# Altium PCB Spring_counter_part_PCB.PcbDoc
Units mm, origin at the board's own origin, x right, y up, seen from the top; angles counter-clockwise.
Board outline 50 x 15 mm, 2 copper layers (Top Layer, Bottom Layer); 102 components, 12 nets, 102 pads, 0 vias.
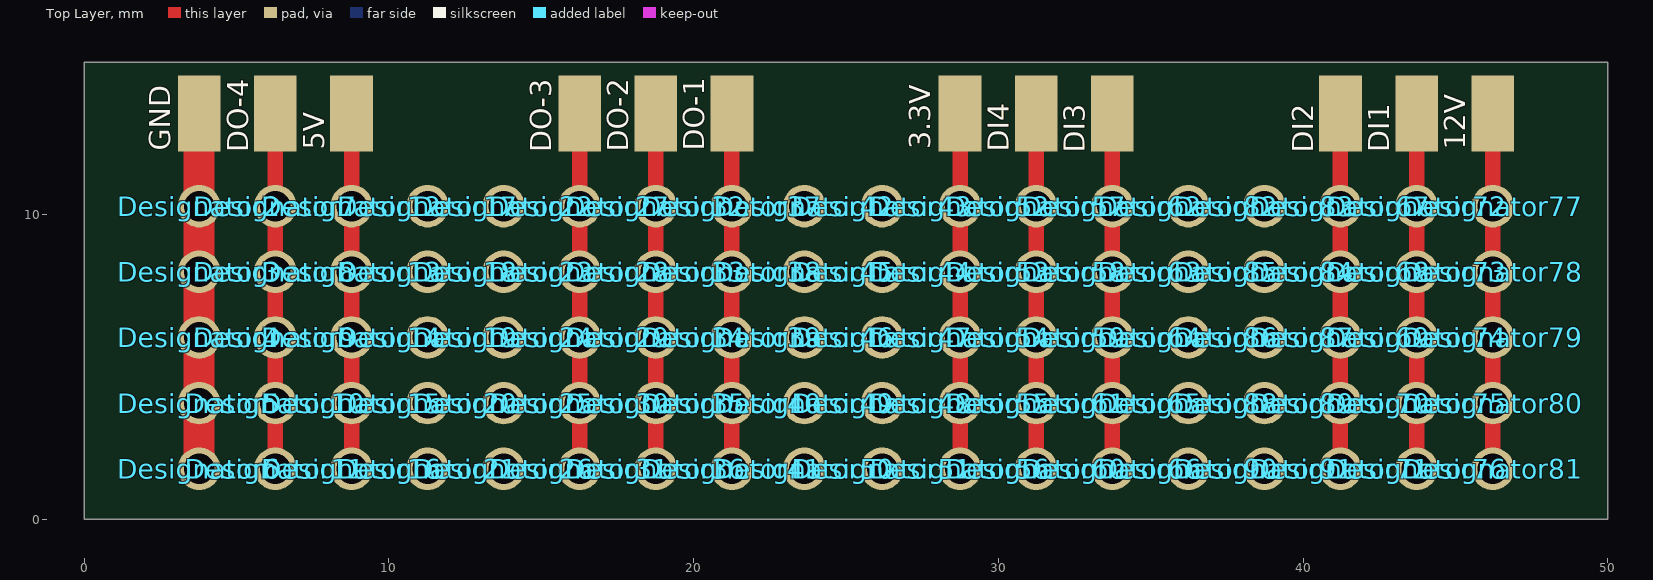
[diagram p0: Top Layer view]
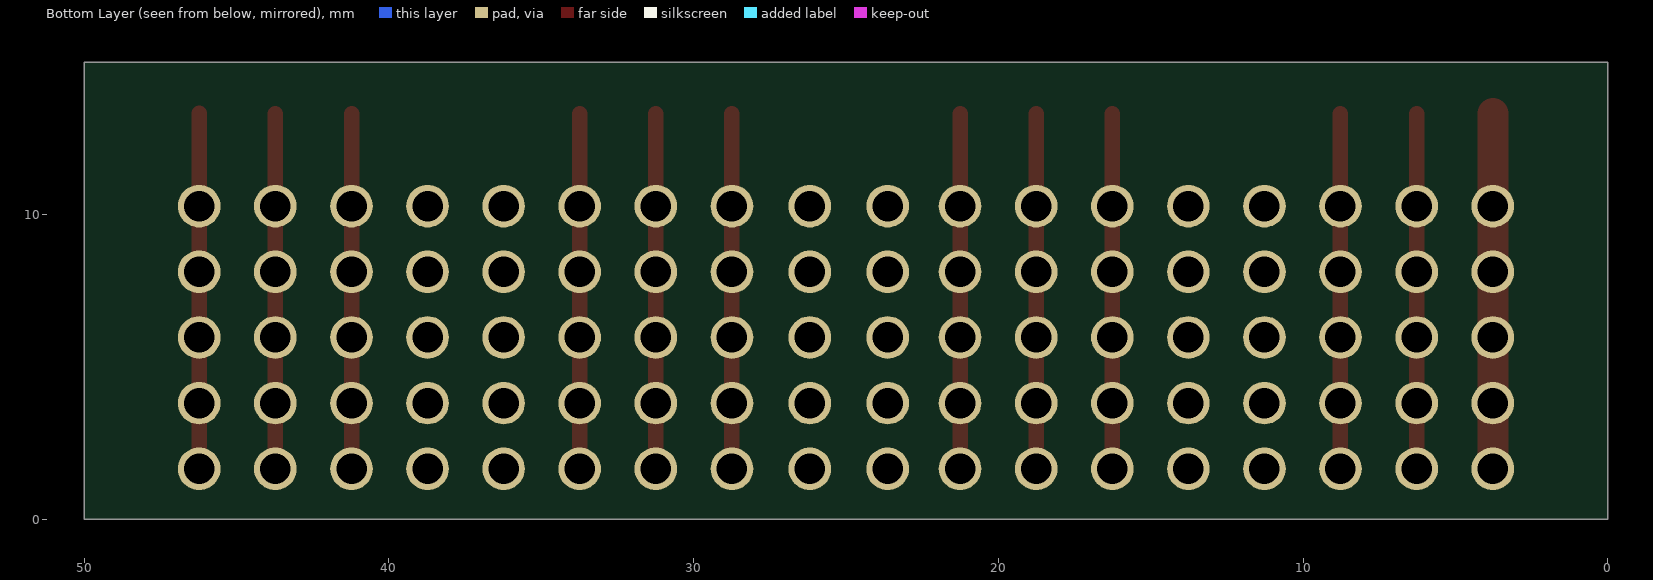
[diagram p1: Bottom Layer view, seen from below]

## Layer stack, top to bottom
Top Solder: solder mask 0.0102, Solder Resist, Dk 3.5
Top Layer: signal copper 0.0356
Dielectric 1: dielectric 0.32, FR-4, Dk 4.8
Bottom Layer: signal copper 0.0356
Bottom Solder: solder mask 0.0102, Solder Resist, Dk 3.5

## Board outline
0,0 50,0 50,15 0,15

## Design rules (kind name [scope] priority, off if disabled: settings)
Clearance Clearance_poly [(InPoly)] p1: gap=0.508 ignorepadtopadclearanceinfootprint=FALSE
Clearance Clearance_IC [IsPad AND HasFootprint('LM3150') OR IsPad AND HasFootprint('TSSOP14') OR IsPad AND HasFootprint('LQFP48') OR IsPad AND HasFootprint('SOT363') OR IsPad AND HasFootprint('SOT563') OR IsPad AND  HasFootprint('LQFP64') OR IsPad AND  HasFootprint('MSOP-8') OR IsPad AND HasFootprint('MEC6-130-02-L-D-RA1')] p2: gap=0.152 ignorepadtopadclearanceinfootprint=FALSE
Clearance [All] p3: gap=0.254 ignorepadtopadclearanceinfootprint=FALSE except(0: Arc-Hole Track-Hole SMDPad-Hole THPad-Hole Via-Hole Fill-Hole Poly-Hole Region-Hole Text-Hole)
ComponentClearance [All] p1: gap=0.508 collisioncheckmode=3 verticalgap=0.254 showdistances=FALSE
Height [All] p1: minheight=0 maxheight=38.1 prefheight=25.4
HoleSize [All] p1: absolutevalues=TRUE maxlimit=8.5 minlimit=0.3 maxpercent=80.000 minpercent=20.000
MinimumAnnularRing [All] p1: minimumring=0.15
MinimumSolderMaskSliver [All] p1: minsoldermaskwidth=0.051
PlaneClearance [All] p1: clearance=0.254
PolygonConnect PolygonConnect_via [All vs IsVIa] p1: connectstyle=Direct reliefconductorwidth=0.254 reliefentries=4 polygonreliefangle="90 Angle" airgapwidth=0.254
PolygonConnect [All] p2: connectstyle=NoConnect reliefconductorwidth=0.254 reliefentries=4 polygonreliefangle="90 Angle" airgapwidth=0.508
RoutingVias [All] p1: holewidth=0.3 width=0.5 viastyle="Through Hole" minholewidth=0.254 minwidth=0.381 maxholewidth=0.711 maxwidth=1.27
SilkToSolderMaskClearance SilkscreenOverComponentPads [IsPad] p1: minsilkscreentomaskgap=0 clearancetoexposedcopper=TRUE
SolderMaskExpansion SolderMaskExpansion_fid [HasFootprint('FIDUCIAL_RUND_1.524mm')] p1: expansion=2 istentingtop=FALSE
SolderMaskExpansion SolderMaskExpansion_Vias [(IsVia)] p2: expansion=-0.1 istentingtop=FALSE
SolderMaskExpansion [All] p3: expansion=0.102 istentingtop=FALSE
Width [All] p1: maxlimit=1.016 minlimit=0.152 preferedwidth=0.254 minimp=50.000000 maximp=50.000000 favimp=50.000000
24 further rules are at their usual default settings.

## Classes and differential pairs
component class Spring_counter_part: 3.3V 5V 12V DI1 DI2 DI3 DI4 DO-1 DO-2 DO-3 DO-4 GND GND1 GND2 GND3 GND4 GND5

## Components (designator, comment, footprint, x,y, rotation, side; value= is the part's Value field where it differs from the comment)
3.3V "Spring_Pad_331031321515" Spring_Contact_Pad_331031321515#1 29.027,13.444 r180 top
5V "Spring_Pad_331031321515" Spring_Contact_Pad_331031321515#2 11.65,13.19 r0 top
12V "Spring_Pad_331031321515" Spring_Contact_Pad_331031321515#3 47.952,13.452 r180 top
Designator2 "Comment" Hole_for_Hole_Plate#1 3.44,10.28 r0 top
Designator3 "Comment" Hole_for_Hole_Plate#2 3.77,8.125 r0 top
Designator4 "Comment" Hole_for_Hole_Plate#2 3.77,5.97 r0 top
Designator5 "Comment" Hole_for_Hole_Plate#2 3.77,3.815 r0 top
Designator6 "Comment" Hole_for_Hole_Plate#2 3.77,1.66 r0 top
Designator7 "Comment" Hole_for_Hole_Plate#2 6.27,10.28 r0 top
Designator8 "Comment" Hole_for_Hole_Plate#2 6.27,8.125 r0 top
Designator9 "Comment" Hole_for_Hole_Plate#2 6.27,5.97 r0 top
Designator10 "Comment" Hole_for_Hole_Plate#2 6.27,3.815 r0 top
Designator11 "Comment" Hole_for_Hole_Plate#2 6.27,1.66 r0 top
Designator12 "Comment" Hole_for_Hole_Plate#2 8.77,10.28 r0 top
Designator13 "Comment" Hole_for_Hole_Plate#2 8.77,8.125 r0 top
Designator14 "Comment" Hole_for_Hole_Plate#2 8.77,5.97 r0 top
Designator15 "Comment" Hole_for_Hole_Plate#2 8.77,3.815 r0 top
Designator16 "Comment" Hole_for_Hole_Plate#2 8.77,1.66 r0 top
Designator17 "Comment" Hole_for_Hole_Plate#2 11.266,10.28 r0 top
Designator18 "Comment" Hole_for_Hole_Plate#2 11.266,8.125 r0 top
Designator19 "Comment" Hole_for_Hole_Plate#2 11.266,5.97 r0 top
Designator20 "Comment" Hole_for_Hole_Plate#2 11.266,3.815 r0 top
Designator21 "Comment" Hole_for_Hole_Plate#2 11.266,1.66 r0 top
Designator22 "Comment" Hole_for_Hole_Plate#2 13.761,10.28 r0 top
Designator23 "Comment" Hole_for_Hole_Plate#2 13.761,8.125 r0 top
Designator24 "Comment" Hole_for_Hole_Plate#2 13.761,5.97 r0 top
Designator25 "Comment" Hole_for_Hole_Plate#2 13.761,3.815 r0 top
Designator26 "Comment" Hole_for_Hole_Plate#2 13.761,1.66 r0 top
Designator27 "Comment" Hole_for_Hole_Plate#2 16.257,10.28 r0 top
Designator28 "Comment" Hole_for_Hole_Plate#2 16.257,8.125 r0 top
Designator29 "Comment" Hole_for_Hole_Plate#2 16.257,5.97 r0 top
Designator30 "Comment" Hole_for_Hole_Plate#2 16.257,3.815 r0 top
Designator31 "Comment" Hole_for_Hole_Plate#2 16.257,1.66 r0 top
Designator32 "Comment" Hole_for_Hole_Plate#2 18.757,10.28 r0 top
Designator33 "Comment" Hole_for_Hole_Plate#2 18.757,8.125 r0 top
Designator34 "Comment" Hole_for_Hole_Plate#2 18.757,5.97 r0 top
Designator35 "Comment" Hole_for_Hole_Plate#2 18.757,3.815 r0 top
Designator36 "Comment" Hole_for_Hole_Plate#2 18.757,1.66 r0 top
Designator37 "Comment" Hole_for_Hole_Plate#2 21.257,10.28 r0 top
Designator38 "Comment" Hole_for_Hole_Plate#2 21.257,8.125 r0 top
Designator39 "Comment" Hole_for_Hole_Plate#2 21.257,5.97 r0 top
Designator40 "Comment" Hole_for_Hole_Plate#2 21.257,3.815 r0 top
Designator41 "Comment" Hole_for_Hole_Plate#2 21.257,1.66 r0 top
Designator42 "Comment" Hole_for_Hole_Plate#2 23.631,10.28 r0 top
Designator43 "Comment" Hole_for_Hole_Plate#2 26.187,10.28 r0 top
Designator44 "Comment" Hole_for_Hole_Plate#2 26.187,8.125 r0 top
Designator45 "Comment" Hole_for_Hole_Plate#2 23.631,8.125 r0 top
Designator46 "Comment" Hole_for_Hole_Plate#2 23.631,5.97 r0 top
Designator47 "Comment" Hole_for_Hole_Plate#2 26.187,5.97 r0 top
Designator48 "Comment" Hole_for_Hole_Plate#2 26.187,3.815 r0 top
Designator49 "Comment" Hole_for_Hole_Plate#2 23.631,3.815 r0 top
Designator50 "Comment" Hole_for_Hole_Plate#2 23.631,1.66 r0 top
Designator51 "Comment" Hole_for_Hole_Plate#2 26.187,1.66 r0 top
Designator52 "Comment" Hole_for_Hole_Plate#2 28.743,10.28 r0 top
Designator53 "Comment" Hole_for_Hole_Plate#2 28.743,8.125 r0 top
Designator54 "Comment" Hole_for_Hole_Plate#2 28.743,5.97 r0 top
Designator55 "Comment" Hole_for_Hole_Plate#2 28.743,3.815 r0 top
Designator56 "Comment" Hole_for_Hole_Plate#2 28.743,1.66 r0 top
Designator57 "Comment" Hole_for_Hole_Plate#2 31.243,10.28 r0 top
Designator58 "Comment" Hole_for_Hole_Plate#2 31.243,8.125 r0 top
Designator59 "Comment" Hole_for_Hole_Plate#2 31.243,5.97 r0 top
Designator60 "Comment" Hole_for_Hole_Plate#2 31.243,1.66 r0 top
Designator61 "Comment" Hole_for_Hole_Plate#2 31.243,3.815 r0 top
Designator62 "Comment" Hole_for_Hole_Plate#2 33.743,10.28 r0 top
Designator63 "Comment" Hole_for_Hole_Plate#2 33.743,8.125 r0 top
Designator64 "Comment" Hole_for_Hole_Plate#2 33.743,5.97 r0 top
Designator65 "Comment" Hole_for_Hole_Plate#2 33.743,3.815 r0 top
Designator66 "Comment" Hole_for_Hole_Plate#2 33.743,1.66 r0 top
Designator67 "Comment" Hole_for_Hole_Plate#2 41.23,10.28 r0 top
Designator68 "Comment" Hole_for_Hole_Plate#2 41.23,8.125 r0 top
Designator69 "Comment" Hole_for_Hole_Plate#2 41.23,5.97 r0 top
Designator70 "Comment" Hole_for_Hole_Plate#2 41.23,3.815 r0 top
Designator71 "Comment" Hole_for_Hole_Plate#2 41.23,1.66 r0 top
Designator72 "Comment" Hole_for_Hole_Plate#2 43.73,10.28 r0 top
Designator73 "Comment" Hole_for_Hole_Plate#2 43.73,8.125 r0 top
Designator74 "Comment" Hole_for_Hole_Plate#2 43.73,5.97 r0 top
Designator75 "Comment" Hole_for_Hole_Plate#2 43.73,3.815 r0 top
Designator76 "Comment" Hole_for_Hole_Plate#2 43.73,1.66 r0 top
Designator77 "Comment" Hole_for_Hole_Plate#2 46.23,10.28 r0 top
Designator78 "Comment" Hole_for_Hole_Plate#2 46.23,8.125 r0 top
Designator79 "Comment" Hole_for_Hole_Plate#2 46.23,5.97 r0 top
Designator80 "Comment" Hole_for_Hole_Plate#2 46.23,3.815 r0 top
Designator81 "Comment" Hole_for_Hole_Plate#2 46.23,1.66 r0 top
Designator82 "Comment" Hole_for_Hole_Plate#2 36.239,10.28 r0 top
Designator83 "Comment" Hole_for_Hole_Plate#2 38.734,10.28 r0 top
Designator84 "Comment" Hole_for_Hole_Plate#2 38.734,8.125 r0 top
Designator85 "Comment" Hole_for_Hole_Plate#2 36.239,8.125 r0 top
Designator86 "Comment" Hole_for_Hole_Plate#2 36.239,5.97 r0 top
Designator87 "Comment" Hole_for_Hole_Plate#2 38.734,5.97 r0 top
Designator88 "Comment" Hole_for_Hole_Plate#2 36.239,3.815 r0 top
Designator89 "Comment" Hole_for_Hole_Plate#2 38.734,3.815 r0 top
Designator90 "Comment" Hole_for_Hole_Plate#2 36.239,1.66 r0 top
Designator91 "Comment" Hole_for_Hole_Plate#2 38.734,1.66 r0 top
DI1 "Spring_Pad_331031321515" Spring_Contact_Pad_331031321515#4 44.3,13.19 r0 top
DI2 "Spring_Pad_331031321515" Spring_Contact_Pad_331031321515#5 41.273,13.19 r0 top
DI3 "Spring_Pad_331031321515" Spring_Contact_Pad_331031321515#6 37.898,13.19 r0 top
DI4 "Spring_Pad_331031321515" Spring_Contact_Pad_331031321515#7 33.9,13.19 r0 top
DO-1 "Spring_Pad_331031321515" Spring_Contact_Pad_331031321515#8 24.652,13.444 r180 top
DO-2 "Spring_Pad_331031321515" Spring_Contact_Pad_331031321515#9 20.977,13.444 r180 top
DO-3 "Spring_Pad_331031321515" Spring_Contact_Pad_331031321515#10 16.577,13.444 r180 top
DO-4 "Spring_Pad_331031321515" Spring_Contact_Pad_331031321515#11 6.625,13.19 r0 top
GND "Spring_Pad_331031321515" Spring_Contact_Pad_331031321515#12 3.63,13.19 r0 top

## Footprints (in the part's own frame and the unit in brackets; to place one, negate y for a bottom-side part, rotate by r counter-clockwise, add the part's x,y. Pads: shape width x height; smd on the part's side, far side on the other; paste and mask are expansions set on the pad)
Hole_for_Hole_Plate#1 [mm]
  round 1.4 hole 1: 4(0.33,0)
Hole_for_Hole_Plate#2 [mm]
  round 1.4 hole 1: 4(0,0)
Spring_Contact_Pad_331031321515#1 [mm]
  rect 1.4x2.5 smd: 1(0.284,0.127)
Spring_Contact_Pad_331031321515#2 [mm]
  rect 1.4x2.5 smd: 1(-2.88,0.127)
Spring_Contact_Pad_331031321515#3 [mm]
  rect 1.4x2.5 smd: 1(1.722,0.127)
Spring_Contact_Pad_331031321515#4 [mm]
  rect 1.4x2.5 smd: 1(-0.57,0.127)
Spring_Contact_Pad_331031321515#5 [mm]
  rect 1.4x2.5 smd: 1(-0.043,0.127)
Spring_Contact_Pad_331031321515#6 [mm]
  rect 1.4x2.5 smd: 1(-4.155,0.127)
Spring_Contact_Pad_331031321515#7 [mm]
  rect 1.4x2.5 smd: 1(-2.657,0.127)
Spring_Contact_Pad_331031321515#8 [mm]
  rect 1.4x2.5 smd: 1(3.395,0.127)
Spring_Contact_Pad_331031321515#9 [mm]
  rect 1.4x2.5 smd: 1(2.22,0.127)
Spring_Contact_Pad_331031321515#10 [mm]
  rect 1.4x2.5 smd: 1(0.32,0.127)
Spring_Contact_Pad_331031321515#11 [mm]
  rect 1.4x2.5 smd: 1(-0.355,0.127)
Spring_Contact_Pad_331031321515#12 [mm]
  rect 1.4x2.5 smd: 1(0.14,0.127)

## Nets (pads, with @x,y where several pads share a name; then routed paths per layer and width w, separated by ;. In a path a pad name is that pad's centre, name@x,y a point inside that pad or via, vN(x,y) a via of type N, cw(c..) or ccw(c..) an arc to the next point about the centre after c; other vN are vias at no path point)
3.3V: 3.3V.1 Designator52.4 Designator53.4 Designator54.4 Designator55.4 Designator56.4 | length 11.7
  Top Layer w0.508: Designator56.4 Designator55.4 Designator54.4 Designator53.4 Designator52.4 3.3V.1
5V: 5V.1 Designator12.4 Designator13.4 Designator14.4 Designator15.4 Designator16.4 | length 11.7
  Top Layer w0.508: Designator16.4 Designator15.4 Designator14.4 Designator13.4 Designator12.4 5V.1
12V: 12V.1 Designator77.4 Designator78.4 Designator79.4 Designator80.4 Designator81.4 | length 11.7
  Top Layer w0.508: Designator81.4 Designator80.4 Designator79.4 Designator78.4 Designator77.4 12V.1
DI1: Designator72.4 Designator73.4 Designator74.4 Designator75.4 Designator76.4 DI1.1 | length 11.7
  Top Layer w0.508: Designator76.4 Designator75.4 Designator74.4 Designator73.4 Designator72.4 DI1.1
DI2: Designator67.4 Designator68.4 Designator69.4 Designator70.4 Designator71.4 DI2.1 | length 11.7
  Top Layer w0.508: Designator71.4 Designator70.4 Designator69.4 Designator68.4 DI2.1
DI3: Designator62.4 Designator63.4 Designator64.4 Designator65.4 Designator66.4 DI3.1 | length 11.7
  Top Layer w0.508: Designator66.4 Designator65.4 Designator64.4 Designator63.4 Designator62.4 DI3.1
DI4: Designator57.4 Designator58.4 Designator59.4 Designator60.4 Designator61.4 DI4.1 | length 11.7
  Top Layer w0.508: Designator60.4 Designator61.4 Designator59.4 Designator58.4 Designator57.4 DI4.1
DO-1: Designator37.4 Designator38.4 Designator39.4 Designator40.4 Designator41.4 DO-1.1 | length 11.7
  Top Layer w0.508: Designator41.4 Designator40.4 Designator39.4 Designator38.4 Designator37.4 DO-1.1
DO-2: Designator32.4 Designator33.4 Designator34.4 Designator35.4 Designator36.4 DO-2.1 | length 11.7
  Top Layer w0.508: Designator36.4 Designator35.4 Designator34.4 Designator33.4 Designator32.4 DO-2.1
DO-3: Designator27.4 Designator28.4 Designator29.4 Designator30.4 Designator31.4 DO-3.1 | length 11.7
  Top Layer w0.508: Designator31.4 Designator30.4 Designator29.4 Designator28.4 Designator27.4 DO-3.1
DO-4: Designator7.4 Designator8.4 Designator9.4 Designator10.4 Designator11.4 DO-4.1 | length 11.7
  Top Layer w0.508: Designator11.4 Designator10.4 Designator9.4 Designator8.4 Designator7.4 DO-4.1
GND: Designator2.4 Designator3.4 Designator4.4 Designator5.4 Designator6.4 GND.1 | length 11.7
  Top Layer w1.016: Designator6.4 Designator5.4 Designator4.4 Designator3.4 Designator2.4 GND.1
pads on no net: Designator17.4 Designator18.4 Designator19.4 Designator20.4 Designator21.4 Designator22.4 Designator23.4 Designator24.4 Designator25.4 Designator26.4 Designator42.4 Designator43.4 Designator44.4 Designator45.4 Designator46.4 Designator47.4 Designator48.4 Designator49.4 Designator50.4 Designator51.4 Designator82.4 Designator83.4 Designator84.4 Designator85.4 Designator86.4 Designator87.4 Designator88.4 Designator89.4 Designator90.4 Designator91.4